# EAGLE board Monoblink_12xPannel (EAGLE 8.6.0)
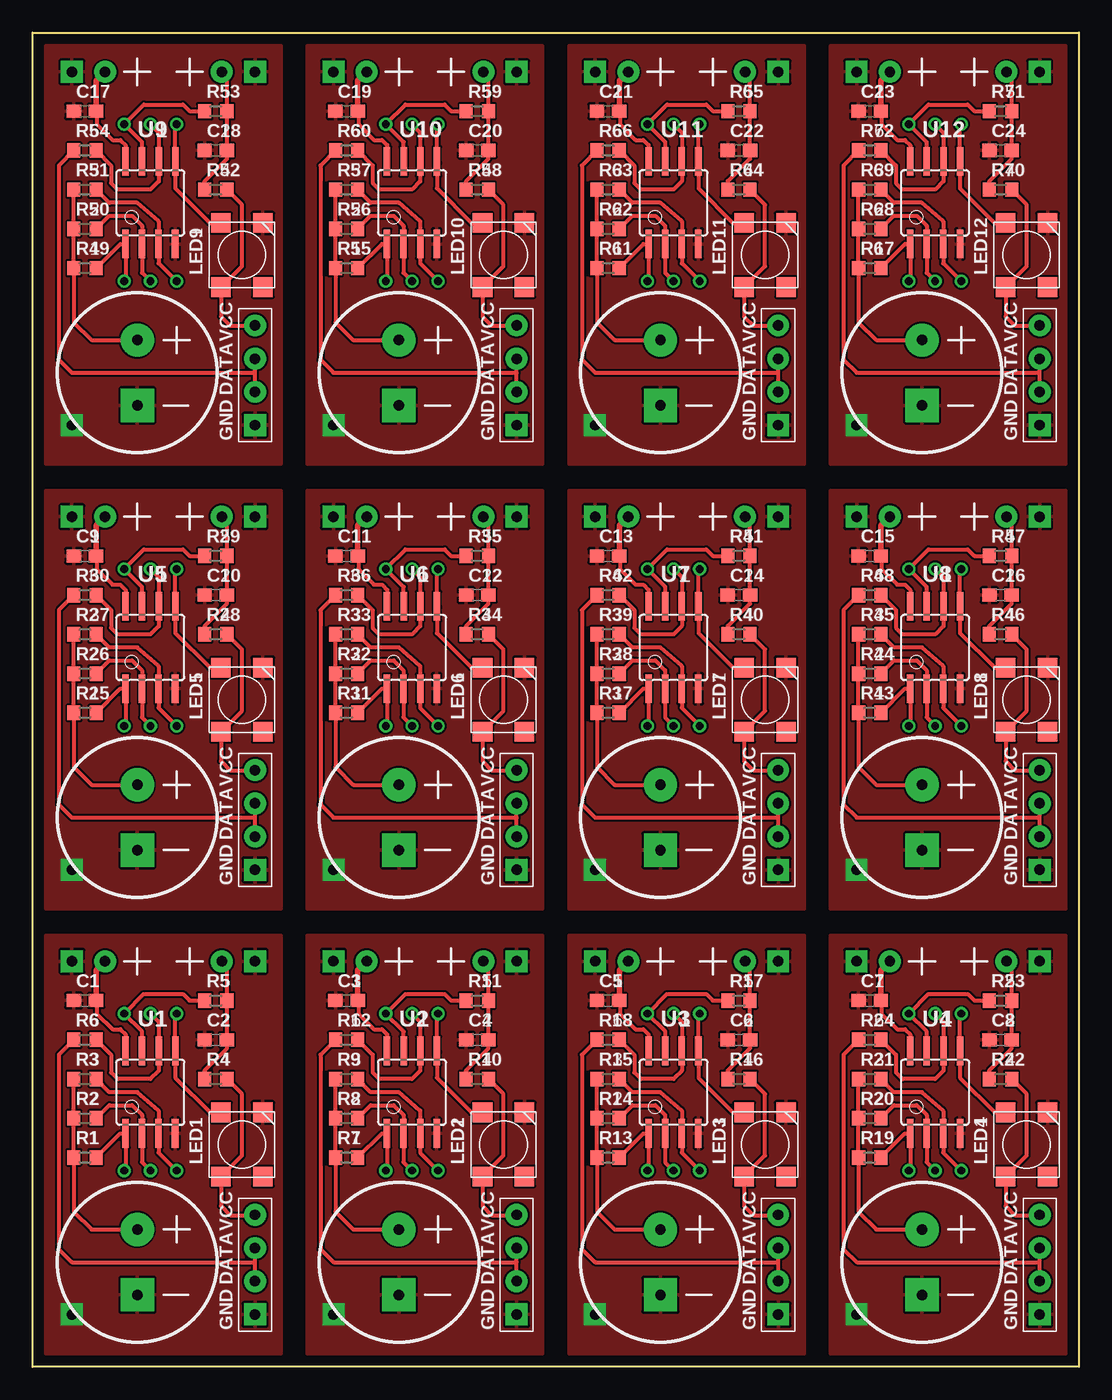
[diagram p0: board, top side]
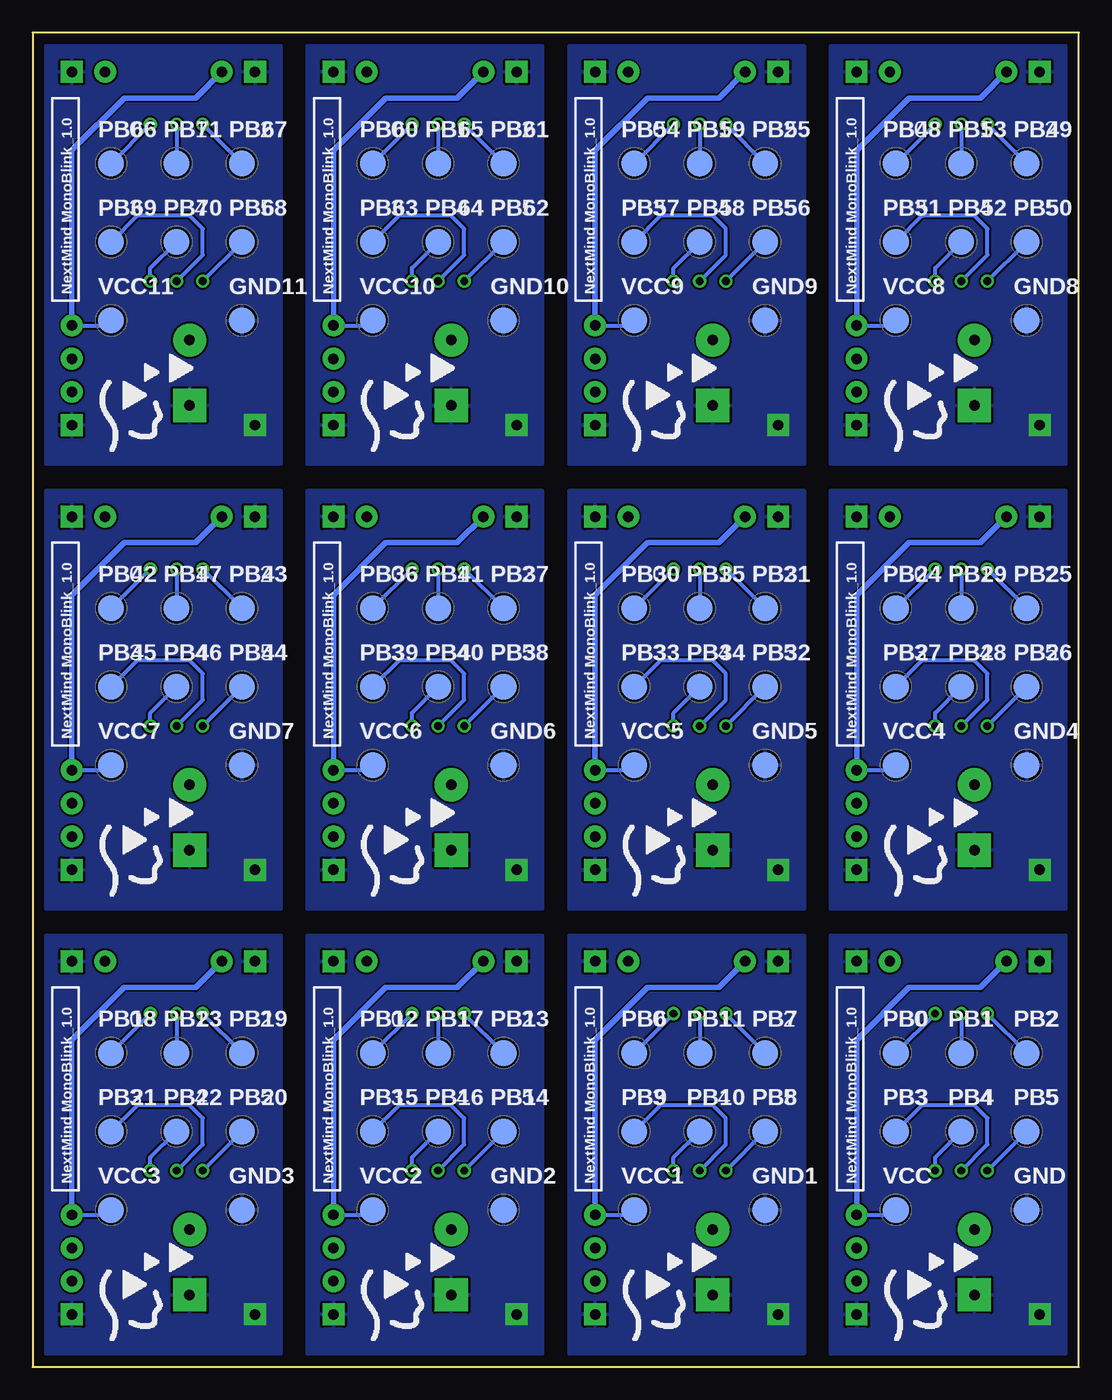
[diagram p1: board, bottom side, seen from below]

Size 80 x 102 mm. Coordinates in mm from the lower left corner, seen from the top.
Outline: 0,0 0,102 80,102 80,0 0,0
Copper layers (1*16): Top 0.018mm / dielectric 1.55mm / Bottom 0.018mm
Design rules "eC_2Layer_PClass6_BaseCopperO18_eCDefault": minimum track width 0.15mm, minimum drill 0.35mm, track to track 0.15mm, track to pad 0.15mm, pad to pad 0.15mm, via to via 0.15mm, smd to smd 0mil, copper to edge 0.25mm, drill to drill 0.35mm, minimum pad ring 0.175mm, minimum via ring 0.125mm, stop-mask expansion 0mil, vias tented up to drill 0.45mm, thermal gap 0.2mm

## Footprints (pad centres in the part's own frame; a part is rotated, then mirrored left to right if it is on the bottom)
C0603 = smd 1.1 x 1: 1 -0.85,0; 2 0.85,0
TP2MM = smd 2 x 2: 1 0,0
SMD5050 = smd 1.5 x 1.5: 1 2.45,-1.6; 2 2.45,1.6; 3 -2.45,1.6; 4 -2.45,-1.6
R0603 = smd 1 x 1.1: 1 -0.85,0; 2 0.85,0
SOIC8 = smd 0.5 x 2.2: 1 -1.905,-3.154; 2 -0.645,-3.154; 3 0.625,-3.154; 4 1.895,-3.154; 5 1.905,3.154; 6 0.635,3.154; 7 -0.635,3.154; 8 -1.905,3.154
RF_CONN = drill 0.8 pad 1.676 square: 1 0,0 | drill 0.8 pad 1.676: 2 0,2.54; 3 0,5.08; 4 0,7.62
PS1240P02BT = drill 0.8 pad 2.54: V+ 0,2.5 | drill 0.8 pad 2.54 square: V- 0,-2.5
TWO_TH = drill 0.8 pad 1.676 square: GND 0,0 | drill 0.8 pad 1.676: VBAT 0,2.54

## Placement (x,y rotation side)
C1  100n  [C0603]  4,28 180 top
C2  100n  [C0603]  14,25 180 top
C3  100n  [C0603]  24,28 180 top
C4  100n  [C0603]  34,25 180 top
C5  100n  [C0603]  44,28 180 top
C6  100n  [C0603]  54,25 180 top
C7  100n  [C0603]  64,28 180 top
C8  100n  [C0603]  74,25 180 top
C9  100n  [C0603]  4,62 180 top
C10  100n  [C0603]  14,59 180 top
C11  100n  [C0603]  24,62 180 top
C12  100n  [C0603]  34,59 180 top
C13  100n  [C0603]  44,62 180 top
C14  100n  [C0603]  54,59 180 top
C15  100n  [C0603]  64,62 180 top
C16  100n  [C0603]  74,59 180 top
C17  100n  [C0603]  4,96 180 top
C18  100n  [C0603]  14,93 180 top
C19  100n  [C0603]  24,96 180 top
C20  100n  [C0603]  34,93 180 top
C21  100n  [C0603]  44,96 180 top
C22  100n  [C0603]  54,93 180 top
C23  100n  [C0603]  64,96 180 top
C24  100n  [C0603]  74,93 180 top
GND  TESTPAD_PROG_BOARD  [TP2MM]  4,12 0 bottom
GND1  TESTPAD_PROG_BOARD  [TP2MM]  24,12 0 bottom
GND2  TESTPAD_PROG_BOARD  [TP2MM]  44,12 0 bottom
GND3  TESTPAD_PROG_BOARD  [TP2MM]  64,12 0 bottom
GND4  TESTPAD_PROG_BOARD  [TP2MM]  4,46 0 bottom
GND5  TESTPAD_PROG_BOARD  [TP2MM]  24,46 0 bottom
GND6  TESTPAD_PROG_BOARD  [TP2MM]  44,46 0 bottom
GND7  TESTPAD_PROG_BOARD  [TP2MM]  64,46 0 bottom
GND8  TESTPAD_PROG_BOARD  [TP2MM]  4,80 0 bottom
GND9  TESTPAD_PROG_BOARD  [TP2MM]  24,80 0 bottom
GND10  TESTPAD_PROG_BOARD  [TP2MM]  44,80 0 bottom
GND11  TESTPAD_PROG_BOARD  [TP2MM]  64,80 0 bottom
LED1  NEOPIXEL  [SMD5050]  16,17 90 top
LED2  NEOPIXEL  [SMD5050]  36,17 90 top
LED3  NEOPIXEL  [SMD5050]  56,17 90 top
LED4  NEOPIXEL  [SMD5050]  76,17 90 top
LED5  NEOPIXEL  [SMD5050]  16,51 90 top
LED6  NEOPIXEL  [SMD5050]  36,51 90 top
LED7  NEOPIXEL  [SMD5050]  56,51 90 top
LED8  NEOPIXEL  [SMD5050]  76,51 90 top
LED9  NEOPIXEL  [SMD5050]  16,85 90 top
LED10  NEOPIXEL  [SMD5050]  36,85 90 top
LED11  NEOPIXEL  [SMD5050]  56,85 90 top
LED12  NEOPIXEL  [SMD5050]  76,85 90 top
PB0  TESTPAD_PROG_BOARD  [TP2MM]  14,24 0 bottom
PB1  TESTPAD_PROG_BOARD  [TP2MM]  9,24 0 bottom
PB2  TESTPAD_PROG_BOARD  [TP2MM]  4,24 0 bottom
PB3  TESTPAD_PROG_BOARD  [TP2MM]  14,18 0 bottom
PB4  TESTPAD_PROG_BOARD  [TP2MM]  9,18 0 bottom
PB5  TESTPAD_PROG_BOARD  [TP2MM]  4,18 0 bottom
PB6  TESTPAD_PROG_BOARD  [TP2MM]  34,24 0 bottom
PB7  TESTPAD_PROG_BOARD  [TP2MM]  24,24 0 bottom
PB8  TESTPAD_PROG_BOARD  [TP2MM]  24,18 0 bottom
PB9  TESTPAD_PROG_BOARD  [TP2MM]  34,18 0 bottom
PB10  TESTPAD_PROG_BOARD  [TP2MM]  29,18 0 bottom
PB11  TESTPAD_PROG_BOARD  [TP2MM]  29,24 0 bottom
PB12  TESTPAD_PROG_BOARD  [TP2MM]  54,24 0 bottom
PB13  TESTPAD_PROG_BOARD  [TP2MM]  44,24 0 bottom
PB14  TESTPAD_PROG_BOARD  [TP2MM]  44,18 0 bottom
PB15  TESTPAD_PROG_BOARD  [TP2MM]  54,18 0 bottom
PB16  TESTPAD_PROG_BOARD  [TP2MM]  49,18 0 bottom
PB17  TESTPAD_PROG_BOARD  [TP2MM]  49,24 0 bottom
PB18  TESTPAD_PROG_BOARD  [TP2MM]  74,24 0 bottom
PB19  TESTPAD_PROG_BOARD  [TP2MM]  64,24 0 bottom
PB20  TESTPAD_PROG_BOARD  [TP2MM]  64,18 0 bottom
PB21  TESTPAD_PROG_BOARD  [TP2MM]  74,18 0 bottom
PB22  TESTPAD_PROG_BOARD  [TP2MM]  69,18 0 bottom
PB23  TESTPAD_PROG_BOARD  [TP2MM]  69,24 0 bottom
PB24  TESTPAD_PROG_BOARD  [TP2MM]  14,58 0 bottom
PB25  TESTPAD_PROG_BOARD  [TP2MM]  4,58 0 bottom
PB26  TESTPAD_PROG_BOARD  [TP2MM]  4,52 0 bottom
PB27  TESTPAD_PROG_BOARD  [TP2MM]  14,52 0 bottom
PB28  TESTPAD_PROG_BOARD  [TP2MM]  9,52 0 bottom
PB29  TESTPAD_PROG_BOARD  [TP2MM]  9,58 0 bottom
PB30  TESTPAD_PROG_BOARD  [TP2MM]  34,58 0 bottom
PB31  TESTPAD_PROG_BOARD  [TP2MM]  24,58 0 bottom
PB32  TESTPAD_PROG_BOARD  [TP2MM]  24,52 0 bottom
PB33  TESTPAD_PROG_BOARD  [TP2MM]  34,52 0 bottom
PB34  TESTPAD_PROG_BOARD  [TP2MM]  29,52 0 bottom
PB35  TESTPAD_PROG_BOARD  [TP2MM]  29,58 0 bottom
PB36  TESTPAD_PROG_BOARD  [TP2MM]  54,58 0 bottom
PB37  TESTPAD_PROG_BOARD  [TP2MM]  44,58 0 bottom
PB38  TESTPAD_PROG_BOARD  [TP2MM]  44,52 0 bottom
PB39  TESTPAD_PROG_BOARD  [TP2MM]  54,52 0 bottom
PB40  TESTPAD_PROG_BOARD  [TP2MM]  49,52 0 bottom
PB41  TESTPAD_PROG_BOARD  [TP2MM]  49,58 0 bottom
PB42  TESTPAD_PROG_BOARD  [TP2MM]  74,58 0 bottom
PB43  TESTPAD_PROG_BOARD  [TP2MM]  64,58 0 bottom
PB44  TESTPAD_PROG_BOARD  [TP2MM]  64,52 0 bottom
PB45  TESTPAD_PROG_BOARD  [TP2MM]  74,52 0 bottom
PB46  TESTPAD_PROG_BOARD  [TP2MM]  69,52 0 bottom
PB47  TESTPAD_PROG_BOARD  [TP2MM]  69,58 0 bottom
PB48  TESTPAD_PROG_BOARD  [TP2MM]  14,92 0 bottom
PB49  TESTPAD_PROG_BOARD  [TP2MM]  4,92 0 bottom
PB50  TESTPAD_PROG_BOARD  [TP2MM]  4,86 0 bottom
PB51  TESTPAD_PROG_BOARD  [TP2MM]  14,86 0 bottom
PB52  TESTPAD_PROG_BOARD  [TP2MM]  9,86 0 bottom
PB53  TESTPAD_PROG_BOARD  [TP2MM]  9,92 0 bottom
PB54  TESTPAD_PROG_BOARD  [TP2MM]  34,92 0 bottom
PB55  TESTPAD_PROG_BOARD  [TP2MM]  24,92 0 bottom
PB56  TESTPAD_PROG_BOARD  [TP2MM]  24,86 0 bottom
PB57  TESTPAD_PROG_BOARD  [TP2MM]  34,86 0 bottom
PB58  TESTPAD_PROG_BOARD  [TP2MM]  29,86 0 bottom
PB59  TESTPAD_PROG_BOARD  [TP2MM]  29,92 0 bottom
PB60  TESTPAD_PROG_BOARD  [TP2MM]  54,92 0 bottom
PB61  TESTPAD_PROG_BOARD  [TP2MM]  44,92 0 bottom
PB62  TESTPAD_PROG_BOARD  [TP2MM]  44,86 0 bottom
PB63  TESTPAD_PROG_BOARD  [TP2MM]  54,86 0 bottom
PB64  TESTPAD_PROG_BOARD  [TP2MM]  49,86 0 bottom
PB65  TESTPAD_PROG_BOARD  [TP2MM]  49,92 0 bottom
PB66  TESTPAD_PROG_BOARD  [TP2MM]  74,92 0 bottom
PB67  TESTPAD_PROG_BOARD  [TP2MM]  64,92 0 bottom
PB68  TESTPAD_PROG_BOARD  [TP2MM]  64,86 0 bottom
PB69  TESTPAD_PROG_BOARD  [TP2MM]  74,86 0 bottom
PB70  TESTPAD_PROG_BOARD  [TP2MM]  69,86 0 bottom
PB71  TESTPAD_PROG_BOARD  [TP2MM]  69,92 0 bottom
R1  50  [R0603]  4,16 180 top
R2  200  [R0603]  4,19 180 top
R3  100  [R0603]  4,22 180 top
R4  10K  [R0603]  14,22 0 top
R5  100K  [R0603]  14,28 180 top
R6  100K  [R0603]  4,25 180 top
R7  50  [R0603]  24,16 180 top
R8  200  [R0603]  24,19 180 top
R9  100  [R0603]  24,22 180 top
R10  10K  [R0603]  34,22 0 top
R11  100K  [R0603]  34,28 180 top
R12  100K  [R0603]  24,25 180 top
R13  50  [R0603]  44,16 180 top
R14  200  [R0603]  44,19 180 top
R15  100  [R0603]  44,22 180 top
R16  10K  [R0603]  54,22 0 top
R17  100K  [R0603]  54,28 180 top
R18  100K  [R0603]  44,25 180 top
R19  50  [R0603]  64,16 180 top
R20  200  [R0603]  64,19 180 top
R21  100  [R0603]  64,22 180 top
R22  10K  [R0603]  74,22 0 top
R23  100K  [R0603]  74,28 180 top
R24  100K  [R0603]  64,25 180 top
R25  50  [R0603]  4,50 180 top
R26  200  [R0603]  4,53 180 top
R27  100  [R0603]  4,56 180 top
R28  10K  [R0603]  14,56 0 top
R29  100K  [R0603]  14,62 180 top
R30  100K  [R0603]  4,59 180 top
R31  50  [R0603]  24,50 180 top
R32  200  [R0603]  24,53 180 top
R33  100  [R0603]  24,56 180 top
R34  10K  [R0603]  34,56 0 top
R35  100K  [R0603]  34,62 180 top
R36  100K  [R0603]  24,59 180 top
R37  50  [R0603]  44,50 180 top
R38  200  [R0603]  44,53 180 top
R39  100  [R0603]  44,56 180 top
R40  10K  [R0603]  54,56 0 top
R41  100K  [R0603]  54,62 180 top
R42  100K  [R0603]  44,59 180 top
R43  50  [R0603]  64,50 180 top
R44  200  [R0603]  64,53 180 top
R45  100  [R0603]  64,56 180 top
R46  10K  [R0603]  74,56 0 top
R47  100K  [R0603]  74,62 180 top
R48  100K  [R0603]  64,59 180 top
R49  50  [R0603]  4,84 180 top
R50  200  [R0603]  4,87 180 top
R51  100  [R0603]  4,90 180 top
R52  10K  [R0603]  14,90 0 top
R53  100K  [R0603]  14,96 180 top
R54  100K  [R0603]  4,93 180 top
R55  50  [R0603]  24,84 180 top
R56  200  [R0603]  24,87 180 top
R57  100  [R0603]  24,90 180 top
R58  10K  [R0603]  34,90 0 top
R59  100K  [R0603]  34,96 180 top
R60  100K  [R0603]  24,93 180 top
R61  50  [R0603]  44,84 180 top
R62  200  [R0603]  44,87 180 top
R63  100  [R0603]  44,90 180 top
R64  10K  [R0603]  54,90 0 top
R65  100K  [R0603]  54,96 180 top
R66  100K  [R0603]  44,93 180 top
R67  50  [R0603]  64,84 180 top
R68  200  [R0603]  64,87 180 top
R69  100  [R0603]  64,90 180 top
R70  10K  [R0603]  74,90 0 top
R71  100K  [R0603]  74,96 180 top
R72  100K  [R0603]  64,93 180 top
U1  ATTINY85  [SOIC8]  9,21 0 top
U2  ATTINY85  [SOIC8]  29,21 0 top
U3  ATTINY85  [SOIC8]  49,21 0 top
U4  ATTINY85  [SOIC8]  69,21 0 top
U5  ATTINY85  [SOIC8]  9,55 0 top
U6  ATTINY85  [SOIC8]  29,55 0 top
U7  ATTINY85  [SOIC8]  49,55 0 top
U8  ATTINY85  [SOIC8]  69,55 0 top
U9  ATTINY85  [SOIC8]  9,89 0 top
U10  ATTINY85  [SOIC8]  29,89 0 top
U11  ATTINY85  [SOIC8]  49,89 0 top
U12  ATTINY85  [SOIC8]  69,89 0 top
U$1  RF_CONN  [RF_CONN]  17,4 0 top
U$2  PIEZO  [PS1240P02BT]  8,8 0 top
U$3  BATT_TH  [TWO_TH]  3,31 270 top
U$4  SNSR_CONN  [TWO_TH]  17,31 90 top
U$5  RF_CONN  [RF_CONN]  37,4 0 top
U$6  PIEZO  [PS1240P02BT]  28,8 0 top
U$7  BATT_TH  [TWO_TH]  23,31 270 top
U$8  SNSR_CONN  [TWO_TH]  37,31 90 top
U$9  RF_CONN  [RF_CONN]  57,4 0 top
U$10  PIEZO  [PS1240P02BT]  48,8 0 top
U$11  BATT_TH  [TWO_TH]  43,31 270 top
U$12  SNSR_CONN  [TWO_TH]  57,31 90 top
U$13  RF_CONN  [RF_CONN]  77,4 0 top
U$14  PIEZO  [PS1240P02BT]  68,8 0 top
U$15  BATT_TH  [TWO_TH]  63,31 270 top
U$16  SNSR_CONN  [TWO_TH]  77,31 90 top
U$17  RF_CONN  [RF_CONN]  17,38 0 top
U$18  PIEZO  [PS1240P02BT]  8,42 0 top
U$19  BATT_TH  [TWO_TH]  3,65 270 top
U$20  SNSR_CONN  [TWO_TH]  17,65 90 top
U$21  RF_CONN  [RF_CONN]  37,38 0 top
U$22  PIEZO  [PS1240P02BT]  28,42 0 top
U$23  BATT_TH  [TWO_TH]  23,65 270 top
U$24  SNSR_CONN  [TWO_TH]  37,65 90 top
U$25  RF_CONN  [RF_CONN]  57,38 0 top
U$26  PIEZO  [PS1240P02BT]  48,42 0 top
U$27  BATT_TH  [TWO_TH]  43,65 270 top
U$28  SNSR_CONN  [TWO_TH]  57,65 90 top
U$29  RF_CONN  [RF_CONN]  77,38 0 top
U$30  PIEZO  [PS1240P02BT]  68,42 0 top
U$31  BATT_TH  [TWO_TH]  63,65 270 top
U$32  SNSR_CONN  [TWO_TH]  77,65 90 top
U$33  RF_CONN  [RF_CONN]  17,72 0 top
U$34  PIEZO  [PS1240P02BT]  8,76 0 top
U$35  BATT_TH  [TWO_TH]  3,99 270 top
U$36  SNSR_CONN  [TWO_TH]  17,99 90 top
U$37  RF_CONN  [RF_CONN]  37,72 0 top
U$38  PIEZO  [PS1240P02BT]  28,76 0 top
U$39  BATT_TH  [TWO_TH]  23,99 270 top
U$40  SNSR_CONN  [TWO_TH]  37,99 90 top
U$41  RF_CONN  [RF_CONN]  57,72 0 top
U$42  PIEZO  [PS1240P02BT]  48,76 0 top
U$43  BATT_TH  [TWO_TH]  43,99 270 top
U$44  SNSR_CONN  [TWO_TH]  57,99 90 top
U$45  RF_CONN  [RF_CONN]  77,72 0 top
U$46  PIEZO  [PS1240P02BT]  68,76 0 top
U$47  BATT_TH  [TWO_TH]  63,99 270 top
U$48  SNSR_CONN  [TWO_TH]  77,99 90 top
VCC  TESTPAD_PROG_BOARD  [TP2MM]  14,12 0 bottom
VCC1  TESTPAD_PROG_BOARD  [TP2MM]  34,12 0 bottom
VCC2  TESTPAD_PROG_BOARD  [TP2MM]  54,12 0 bottom
VCC3  TESTPAD_PROG_BOARD  [TP2MM]  74,12 0 bottom
VCC4  TESTPAD_PROG_BOARD  [TP2MM]  14,46 0 bottom
VCC5  TESTPAD_PROG_BOARD  [TP2MM]  34,46 0 bottom
VCC6  TESTPAD_PROG_BOARD  [TP2MM]  54,46 0 bottom
VCC7  TESTPAD_PROG_BOARD  [TP2MM]  74,46 0 bottom
VCC8  TESTPAD_PROG_BOARD  [TP2MM]  14,80 0 bottom
VCC9  TESTPAD_PROG_BOARD  [TP2MM]  34,80 0 bottom
VCC10  TESTPAD_PROG_BOARD  [TP2MM]  54,80 0 bottom
VCC11  TESTPAD_PROG_BOARD  [TP2MM]  74,80 0 bottom

## Library data of the parts
C1-C24 = Monoblink; SPICEPREFIX: C
GND GND1-GND11 LED1-LED12 PB0 PB1-PB71 U1-U12 U$1-U$48 VCC VCC1-VCC11 = Monoblink
R1-R72 = Monoblink; SPICEPREFIX: R

## Nets
GND: C1.2 C2.2 GND.1 LED1.1 U1.4 U$1.1 U$2.V- U$3.GND U$4.GND
GND1: C3.2 C4.2 GND1.1 LED2.1 U2.4 U$5.1 U$6.V- U$7.GND U$8.GND
GND2: C5.2 C6.2 GND2.1 LED3.1 U3.4 U$9.1 U$10.V- U$11.GND U$12.GND
GND3: C7.2 C8.2 GND3.1 LED4.1 U4.4 U$13.1 U$14.V- U$15.GND U$16.GND
GND4: C9.2 C10.2 GND4.1 LED5.1 U5.4 U$17.1 U$18.V- U$19.GND U$20.GND
GND5: C11.2 C12.2 GND5.1 LED6.1 U6.4 U$21.1 U$22.V- U$23.GND U$24.GND
GND6: C13.2 C14.2 GND6.1 LED7.1 U7.4 U$25.1 U$26.V- U$27.GND U$28.GND
GND7: C15.2 C16.2 GND7.1 LED8.1 U8.4 U$29.1 U$30.V- U$31.GND U$32.GND
GND8: C17.2 C18.2 GND8.1 LED9.1 U9.4 U$33.1 U$34.V- U$35.GND U$36.GND
GND9: C19.2 C20.2 GND9.1 LED10.1 U10.4 U$37.1 U$38.V- U$39.GND U$40.GND
GND10: C21.2 C22.2 GND10.1 LED11.1 U11.4 U$41.1 U$42.V- U$43.GND U$44.GND
GND11: C23.2 C24.2 GND11.1 LED12.1 U12.4 U$45.1 U$46.V- U$47.GND U$48.GND
LED_DATA_OUT: LED1.4
LED_DATA_OUT1: LED2.4
LED_DATA_OUT2: LED3.4
LED_DATA_OUT3: LED4.4
LED_DATA_OUT4: LED5.4
LED_DATA_OUT5: LED6.4
LED_DATA_OUT6: LED7.4
LED_DATA_OUT7: LED8.4
LED_DATA_OUT8: LED9.4
LED_DATA_OUT9: LED10.4
LED_DATA_OUT10: LED11.4
LED_DATA_OUT11: LED12.4
PB0: LED1.2 PB0.1 U1.5
PB1: PB1.1 R6.1 U1.6
PB2: PB2.1 R5.2 U1.7
PB3: PB3.1 R2.1 U1.2
PB4: PB4.1 R3.1 U1.3
PB5: PB5.1 R1.1 U1.1
PB6: PB8.1 R7.1 U2.1
PB7: PB10.1 R9.1 U2.3
PB8: PB9.1 R8.1 U2.2
PB9: PB7.1 R11.2 U2.7
PB10: PB11.1 R12.1 U2.6
PB11: LED2.2 PB6.1 U2.5
PB12: PB14.1 R13.1 U3.1
PB13: PB16.1 R15.1 U3.3
PB14: PB15.1 R14.1 U3.2
PB15: PB13.1 R17.2 U3.7
PB16: PB17.1 R18.1 U3.6
PB17: LED3.2 PB12.1 U3.5
PB18: PB20.1 R19.1 U4.1
PB19: PB22.1 R21.1 U4.3
PB20: PB21.1 R20.1 U4.2
PB21: PB19.1 R23.2 U4.7
PB22: PB23.1 R24.1 U4.6
PB23: LED4.2 PB18.1 U4.5
PB24: PB26.1 R25.1 U5.1
PB25: PB28.1 R27.1 U5.3
PB26: PB27.1 R26.1 U5.2
PB27: PB25.1 R29.2 U5.7
PB28: PB29.1 R30.1 U5.6
PB29: LED5.2 PB24.1 U5.5
PB30: PB32.1 R31.1 U6.1
PB31: PB34.1 R33.1 U6.3
PB32: PB33.1 R32.1 U6.2
PB33: PB31.1 R35.2 U6.7
PB34: PB35.1 R36.1 U6.6
PB35: LED6.2 PB30.1 U6.5
PB36: PB38.1 R37.1 U7.1
PB37: PB40.1 R39.1 U7.3
PB38: PB39.1 R38.1 U7.2
PB39: PB37.1 R41.2 U7.7
PB40: PB41.1 R42.1 U7.6
PB41: LED7.2 PB36.1 U7.5
PB42: PB44.1 R43.1 U8.1
PB43: PB46.1 R45.1 U8.3
PB44: PB45.1 R44.1 U8.2
PB45: PB43.1 R47.2 U8.7
PB46: PB47.1 R48.1 U8.6
PB47: LED8.2 PB42.1 U8.5
PB48: PB50.1 R49.1 U9.1
PB49: PB52.1 R51.1 U9.3
PB50: PB51.1 R50.1 U9.2
PB51: PB49.1 R53.2 U9.7
PB52: PB53.1 R54.1 U9.6
PB53: LED9.2 PB48.1 U9.5
PB54: PB56.1 R55.1 U10.1
PB55: PB58.1 R57.1 U10.3
PB56: PB57.1 R56.1 U10.2
PB57: PB55.1 R59.2 U10.7
PB58: PB59.1 R60.1 U10.6
PB59: LED10.2 PB54.1 U10.5
PB60: PB62.1 R61.1 U11.1
PB61: PB64.1 R63.1 U11.3
PB62: PB63.1 R62.1 U11.2
PB63: PB61.1 R65.2 U11.7
PB64: PB65.1 R66.1 U11.6
PB65: LED11.2 PB60.1 U11.5
PB66: PB68.1 R67.1 U12.1
PB67: PB70.1 R69.1 U12.3
PB68: PB69.1 R68.1 U12.2
PB69: PB67.1 R71.2 U12.7
PB70: PB71.1 R72.1 U12.6
PB71: LED12.2 PB66.1 U12.5
PIEZO_IN: R1.2 R2.2 R3.2 U$2.V+
PIEZO_IN1: R7.2 R8.2 R9.2 U$6.V+
PIEZO_IN2: R13.2 R14.2 R15.2 U$10.V+
PIEZO_IN3: R19.2 R20.2 R21.2 U$14.V+
PIEZO_IN4: R25.2 R26.2 R27.2 U$18.V+
PIEZO_IN5: R31.2 R32.2 R33.2 U$22.V+
PIEZO_IN6: R37.2 R38.2 R39.2 U$26.V+
PIEZO_IN7: R43.2 R44.2 R45.2 U$30.V+
PIEZO_IN8: R49.2 R50.2 R51.2 U$34.V+
PIEZO_IN9: R55.2 R56.2 R57.2 U$38.V+
PIEZO_IN10: R61.2 R62.2 R63.2 U$42.V+
PIEZO_IN11: R67.2 R68.2 R69.2 U$46.V+
RF_DATA_OUT: R6.2 U$1.2 U$1.3
RF_DATA_OUT1: R12.2 U$5.2 U$5.3
RF_DATA_OUT2: R18.2 U$9.2 U$9.3
RF_DATA_OUT3: R24.2 U$13.2 U$13.3
RF_DATA_OUT4: R30.2 U$17.2 U$17.3
RF_DATA_OUT5: R36.2 U$21.2 U$21.3
RF_DATA_OUT6: R42.2 U$25.2 U$25.3
RF_DATA_OUT7: R48.2 U$29.2 U$29.3
RF_DATA_OUT8: R54.2 U$33.2 U$33.3
RF_DATA_OUT9: R60.2 U$37.2 U$37.3
RF_DATA_OUT10: R66.2 U$41.2 U$41.3
RF_DATA_OUT11: R72.2 U$45.2 U$45.3
SENSOR_OUT: C2.1 R4.1 R5.1 U$4.VBAT
SENSOR_OUT1: C4.1 R10.1 R11.1 U$8.VBAT
SENSOR_OUT2: C6.1 R16.1 R17.1 U$12.VBAT
SENSOR_OUT3: C8.1 R22.1 R23.1 U$16.VBAT
SENSOR_OUT4: C10.1 R28.1 R29.1 U$20.VBAT
SENSOR_OUT5: C12.1 R34.1 R35.1 U$24.VBAT
SENSOR_OUT6: C14.1 R40.1 R41.1 U$28.VBAT
SENSOR_OUT7: C16.1 R46.1 R47.1 U$32.VBAT
SENSOR_OUT8: C18.1 R52.1 R53.1 U$36.VBAT
SENSOR_OUT9: C20.1 R58.1 R59.1 U$40.VBAT
SENSOR_OUT10: C22.1 R64.1 R65.1 U$44.VBAT
SENSOR_OUT11: C24.1 R70.1 R71.1 U$48.VBAT
VCC: C1.1 LED1.3 R4.2 U1.8 U$1.4 U$3.VBAT VCC.1
VCC1: C3.1 LED2.3 R10.2 U2.8 U$5.4 U$7.VBAT VCC1.1
VCC2: C5.1 LED3.3 R16.2 U3.8 U$9.4 U$11.VBAT VCC2.1
VCC3: C7.1 LED4.3 R22.2 U4.8 U$13.4 U$15.VBAT VCC3.1
VCC4: C9.1 LED5.3 R28.2 U5.8 U$17.4 U$19.VBAT VCC4.1
VCC5: C11.1 LED6.3 R34.2 U6.8 U$21.4 U$23.VBAT VCC5.1
VCC6: C13.1 LED7.3 R40.2 U7.8 U$25.4 U$27.VBAT VCC6.1
VCC7: C15.1 LED8.3 R46.2 U8.8 U$29.4 U$31.VBAT VCC7.1
VCC8: C17.1 LED9.3 R52.2 U9.8 U$33.4 U$35.VBAT VCC8.1
VCC9: C19.1 LED10.3 R58.2 U10.8 U$37.4 U$39.VBAT VCC9.1
VCC10: C21.1 LED11.3 R64.2 U11.8 U$41.4 U$43.VBAT VCC10.1
VCC11: C23.1 LED12.3 R70.2 U12.8 U$45.4 U$47.VBAT VCC11.1

## Tracks (layer width: path | path; a pad name or v marks a point on that pad's centre or on a via)
GND  (via drill 0.8 pad 1.68)
  other vias: 3,4
  pour Top (rank 3): 1,33 19,33 19,1 1,1
  pour Bottom (rank 2): 1,33 19,33 19,1 1,1
GND1  (via drill 0.8 pad 1.68)
  other vias: 23,4
  pour Top (rank 3): 21,33 39,33 39,1 21,1
  pour Bottom (rank 2): 21,33 39,33 39,1 21,1
GND2  (via drill 0.8 pad 1.68)
  other vias: 43,4
  pour Top (rank 3): 41,33 59,33 59,1 41,1
  pour Bottom (rank 2): 41,33 59,33 59,1 41,1
GND3  (via drill 0.8 pad 1.68)
  other vias: 63,4
  pour Top (rank 3): 61,33 79,33 79,1 61,1
  pour Bottom (rank 2): 61,33 79,33 79,1 61,1
GND4  (via drill 0.8 pad 1.68)
  other vias: 3,38
  pour Top (rank 3): 1,67 19,67 19,35 1,35
  pour Bottom (rank 2): 1,67 19,67 19,35 1,35
GND5  (via drill 0.8 pad 1.68)
  other vias: 23,38
  pour Top (rank 3): 21,67 39,67 39,35 21,35
  pour Bottom (rank 2): 21,67 39,67 39,35 21,35
GND6  (via drill 0.8 pad 1.68)
  other vias: 43,38
  pour Top (rank 3): 41,67 59,67 59,35 41,35
  pour Bottom (rank 2): 41,67 59,67 59,35 41,35
GND7  (via drill 0.8 pad 1.68)
  other vias: 63,38
  pour Top (rank 3): 61,67 79,67 79,35 61,35
  pour Bottom (rank 2): 61,67 79,67 79,35 61,35
GND8  (via drill 0.8 pad 1.68)
  other vias: 3,72
  pour Top (rank 3): 1,101 19,101 19,69 1,69
  pour Bottom (rank 2): 1,101 19,101 19,69 1,69
GND9  (via drill 0.8 pad 1.68)
  other vias: 23,72
  pour Top (rank 3): 21,101 39,101 39,69 21,69
  pour Bottom (rank 2): 21,101 39,101 39,69 21,69
GND10  (via drill 0.8 pad 1.68)
  other vias: 43,72
  pour Top (rank 3): 41,101 59,101 59,69 41,69
  pour Bottom (rank 2): 41,101 59,101 59,69 41,69
GND11  (via drill 0.8 pad 1.68)
  other vias: 63,72
  pour Top (rank 3): 61,101 79,101 79,69 61,69
  pour Bottom (rank 2): 61,101 79,101 79,69 61,69
PB0  (via drill 0.6 pad 1)
  Top 0.305: U1.5 10.9,26.91 v11,27 | U1.5 11,24.06 | LED1.2 13.55,19.45 10.9,22.09 U1.5
  Bottom 0.305: v11,27 PB0.1
PB1  (via drill 0.6 pad 1)
  Top 0.305: v9,27 9.63,26.36 U1.6 9.63,22.64 9,22 6.5,22 6,22.5 6,23.85 R6.1
  Bottom 0.305: v9,27 PB1.1
PB2  (via drill 0.6 pad 1)
  Top 0.305: U1.7 8.37,25.64 v7,27 8.5,28.5 11.5,28.5 12,28 R5.2
  Bottom 0.305: v7,27 PB2.1
PB3  (via drill 0.6 pad 1)
  Top 0.305: R2.1 5.85,20 7.6,20 8.36,19.25 U1.2 8.36,15.64 v9,15
  Bottom 0.305: v9,15 7,17 7,19 8,20 12,20 PB3.1
PB4  (via drill 0.6 pad 1)
  Top 0.305: v11,15 9.62,16.38 U1.3 9.62,19.57 8,21 5.85,21 R3.1
  Bottom 0.305: v11,15 11,16 PB4.1
PB5  (via drill 0.6 pad 1)
  Top 0.305: R1.1 6.7,17.85 U1.1 7.09,15.1 v7,15
  Bottom 0.305: v7,15 PB5.1
PB6  (via drill 0.6 pad 1)
  Top 0.305: R7.1 26.7,17.85 U2.1 27.09,15.1 v27,15
  Bottom 0.305: v27,15 PB8.1
PB7  (via drill 0.6 pad 1)
  Top 0.305: v31,15 29.62,16.38 U2.3 29.62,19.57 28,21 25.85,21 R9.1
  Bottom 0.305: v31,15 31,16 PB10.1
PB8  (via drill 0.6 pad 1)
  Top 0.305: R8.1 25.85,20 27.6,20 28.36,19.25 U2.2 28.36,15.64 v29,15
  Bottom 0.305: v29,15 27,17 27,19 28,20 32,20 PB9.1
PB9  (via drill 0.6 pad 1)
  Top 0.305: U2.7 28.36,25.64 v27,27 28.5,28.5 31.5,28.5 32,28 R11.2
  Bottom 0.305: v27,27 PB7.1
PB10  (via drill 0.6 pad 1)
  Top 0.305: v29,27 29.64,26.36 U2.6 29.64,22.64 29,22 26.5,22 26,22.5 26,23.85 R12.1
  Bottom 0.305: v29,27 PB11.1
PB11  (via drill 0.6 pad 1)
  Top 0.305: U2.5 30.91,26.91 v31,27 | U2.5 31,24.06 | LED2.2 33.55,19.45 30.91,22.09 U2.5
  Bottom 0.305: v31,27 PB6.1
PB12  (via drill 0.6 pad 1)
  Top 0.305: R13.1 46.7,17.85 U3.1 47.09,15.1 v47,15
  Bottom 0.305: v47,15 PB14.1
PB13  (via drill 0.6 pad 1)
  Top 0.305: v51,15 49.62,16.38 U3.3 49.62,19.57 48,21 45.85,21 R15.1
  Bottom 0.305: v51,15 51,16 PB16.1
PB14  (via drill 0.6 pad 1)
  Top 0.305: R14.1 45.85,20 47.6,20 48.35,19.25 U3.2 48.35,15.64 v49,15
  Bottom 0.305: v49,15 47,17 47,19 48,20 52,20 PB15.1
PB15  (via drill 0.6 pad 1)
  Top 0.305: U3.7 48.37,25.64 v47,27 48.5,28.5 51.5,28.5 52,28 R17.2
  Bottom 0.305: v47,27 PB13.1
PB16  (via drill 0.6 pad 1)
  Top 0.305: v49,27 49.63,26.36 U3.6 49.63,22.64 49,22 46.5,22 46,22.5 46,23.85 R18.1
  Bottom 0.305: v49,27 PB17.1
PB17  (via drill 0.6 pad 1)
  Top 0.305: U3.5 50.91,26.91 v51,27 | U3.5 51,24.06 | LED3.2 53.55,19.45 50.91,22.09 U3.5
  Bottom 0.305: v51,27 PB12.1
PB18  (via drill 0.6 pad 1)
  Top 0.305: R19.1 66.7,17.85 U4.1 67.09,15.1 v67,15
  Bottom 0.305: v67,15 PB20.1
PB19  (via drill 0.6 pad 1)
  Top 0.305: v71,15 69.62,16.38 U4.3 69.62,19.57 68,21 65.85,21 R21.1
  Bottom 0.305: v71,15 71,16 PB22.1
PB20  (via drill 0.6 pad 1)
  Top 0.305: R20.1 65.85,20 67.6,20 68.36,19.25 U4.2 68.36,15.64 v69,15
  Bottom 0.305: v69,15 67,17 67,19 68,20 72,20 PB21.1
PB21  (via drill 0.6 pad 1)
  Top 0.305: U4.7 68.36,25.64 v67,27 68.5,28.5 71.5,28.5 72,28 R23.2
  Bottom 0.305: v67,27 PB19.1
PB22  (via drill 0.6 pad 1)
  Top 0.305: v69,27 69.64,26.36 U4.6 69.64,22.64 69,22 66.5,22 66,22.5 66,23.85 R24.1
  Bottom 0.305: v69,27 PB23.1
PB23  (via drill 0.6 pad 1)
  Top 0.305: U4.5 70.91,26.91 v71,27 | U4.5 71,24.06 | LED4.2 73.55,19.45 70.91,22.09 U4.5
  Bottom 0.305: v71,27 PB18.1
PB24  (via drill 0.6 pad 1)
  Top 0.305: R25.1 6.7,51.85 U5.1 7.09,49.09 v7,49
  Bottom 0.305: v7,49 PB26.1
PB25  (via drill 0.6 pad 1)
  Top 0.305: v11,49 9.62,50.38 U5.3 9.62,53.58 8,55 5.85,55 R27.1
  Bottom 0.305: v11,49 11,50 PB28.1
PB26  (via drill 0.6 pad 1)
  Top 0.305: R26.1 5.85,54 7.6,54 8.36,53.24 U5.2 8.36,49.65 v9,49
  Bottom 0.305: v9,49 7,51 7,53 8,54 12,54 PB27.1
PB27  (via drill 0.6 pad 1)
  Top 0.305: U5.7 8.37,59.63 v7,61 8.5,62.5 11.5,62.5 12,62 R29.2
  Bottom 0.305: v7,61 PB25.1
PB28  (via drill 0.6 pad 1)
  Top 0.305: v9,61 9.63,60.37 U5.6 9.63,56.63 9,56 6.5,56 6,56.5 6,57.85 R30.1
  Bottom 0.305: v9,61 PB29.1
PB29  (via drill 0.6 pad 1)
  Top 0.305: U5.5 10.9,60.91 v11,61 | U5.5 11,58.06 | LED5.2 13.55,53.45 10.9,56.09 U5.5
  Bottom 0.305: v11,61 PB24.1
PB30  (via drill 0.6 pad 1)
  Top 0.305: R31.1 26.7,51.85 U6.1 27.09,49.09 v27,49
  Bottom 0.305: v27,49 PB32.1
PB31  (via drill 0.6 pad 1)
  Top 0.305: v31,49 29.62,50.38 U6.3 29.62,53.58 28,55 25.85,55 R33.1
  Bottom 0.305: v31,49 31,50 PB34.1
PB32  (via drill 0.6 pad 1)
  Top 0.305: R32.1 25.85,54 27.6,54 28.36,53.24 U6.2 28.36,49.65 v29,49
  Bottom 0.305: v29,49 27,51 27,53 28,54 32,54 PB33.1
PB33  (via drill 0.6 pad 1)
  Top 0.305: U6.7 28.36,59.63 v27,61 28.5,62.5 31.5,62.5 32,62 R35.2
  Bottom 0.305: v27,61 PB31.1
PB34  (via drill 0.6 pad 1)
  Top 0.305: v29,61 29.64,60.37 U6.6 29.64,56.63 29,56 26.5,56 26,56.5 26,57.85 R36.1
  Bottom 0.305: v29,61 PB35.1
PB35  (via drill 0.6 pad 1)
  Top 0.305: U6.5 30.91,60.91 v31,61 | U6.5 31,58.06 | LED6.2 33.55,53.45 30.91,56.09 U6.5
  Bottom 0.305: v31,61 PB30.1
PB36  (via drill 0.6 pad 1)
  Top 0.305: R37.1 46.7,51.85 U7.1 47.09,49.09 v47,49
  Bottom 0.305: v47,49 PB38.1
PB37  (via drill 0.6 pad 1)
  Top 0.305: v51,49 49.62,50.38 U7.3 49.62,53.58 48,55 45.85,55 R39.1
  Bottom 0.305: v51,49 51,50 PB40.1
PB38  (via drill 0.6 pad 1)
  Top 0.305: R38.1 45.85,54 47.6,54 48.35,53.24 U7.2 48.35,49.65 v49,49
  Bottom 0.305: v49,49 47,51 47,53 48,54 52,54 PB39.1
PB39  (via drill 0.6 pad 1)
  Top 0.305: U7.7 48.37,59.63 v47,61 48.5,62.5 51.5,62.5 52,62 R41.2
  Bottom 0.305: v47,61 PB37.1
PB40  (via drill 0.6 pad 1)
  Top 0.305: v49,61 49.63,60.37 U7.6 49.63,56.63 49,56 46.5,56 46,56.5 46,57.85 R42.1
  Bottom 0.305: v49,61 PB41.1
PB41  (via drill 0.6 pad 1)
  Top 0.305: U7.5 50.91,60.91 v51,61 | U7.5 51,58.06 | LED7.2 53.55,53.45 50.91,56.09 U7.5
  Bottom 0.305: v51,61 PB36.1
PB42  (via drill 0.6 pad 1)
  Top 0.305: R43.1 66.7,51.85 U8.1 67.09,49.09 v67,49
  Bottom 0.305: v67,49 PB44.1
PB43  (via drill 0.6 pad 1)
  Top 0.305: v71,49 69.62,50.38 U8.3 69.62,53.58 68,55 65.85,55 R45.1
  Bottom 0.305: v71,49 71,50 PB46.1
PB44  (via drill 0.6 pad 1)
  Top 0.305: R44.1 65.85,54 67.6,54 68.36,53.24 U8.2 68.36,49.65 v69,49
  Bottom 0.305: v69,49 67,51 67,53 68,54 72,54 PB45.1
PB45  (via drill 0.6 pad 1)
  Top 0.305: U8.7 68.36,59.63 v67,61 68.5,62.5 71.5,62.5 72,62 R47.2
  Bottom 0.305: v67,61 PB43.1
PB46  (via drill 0.6 pad 1)
  Top 0.305: v69,61 69.64,60.37 U8.6 69.64,56.63 69,56 66.5,56 66,56.5 66,57.85 R48.1
  Bottom 0.305: v69,61 PB47.1
PB47  (via drill 0.6 pad 1)
  Top 0.305: U8.5 70.91,60.91 v71,61 | U8.5 71,58.06 | LED8.2 73.55,53.45 70.91,56.09 U8.5
  Bottom 0.305: v71,61 PB42.1
PB48  (via drill 0.6 pad 1)
  Top 0.305: R49.1 6.7,85.85 U9.1 7.09,83.09 v7,83
  Bottom 0.305: v7,83 PB50.1
PB49  (via drill 0.6 pad 1)
  Top 0.305: v11,83 9.62,84.38 U9.3 9.62,87.58 8,89 5.85,89 R51.1
  Bottom 0.305: v11,83 11,84 PB52.1
PB50  (via drill 0.6 pad 1)
  Top 0.305: R50.1 5.85,88 7.6,88 8.36,87.25 U9.2 8.36,83.64 v9,83
  Bottom 0.305: v9,83 7,85 7,87 8,88 12,88 PB51.1
PB51  (via drill 0.6 pad 1)
  Top 0.305: U9.7 8.37,93.64 v7,95 8.5,96.5 11.5,96.5 12,96 R53.2
  Bottom 0.305: v7,95 PB49.1
PB52  (via drill 0.6 pad 1)
  Top 0.305: v9,95 9.63,94.36 U9.6 9.63,90.64 9,90 6.5,90 6,90.5 6,91.85 R54.1
  Bottom 0.305: v9,95 PB53.1
PB53  (via drill 0.6 pad 1)
  Top 0.305: U9.5 10.9,94.91 v11,95 | U9.5 11,92.06 | LED9.2 13.55,87.45 10.9,90.09 U9.5
  Bottom 0.305: v11,95 PB48.1
PB54  (via drill 0.6 pad 1)
  Top 0.305: R55.1 26.7,85.85 U10.1 27.09,83.09 v27,83
  Bottom 0.305: v27,83 PB56.1
PB55  (via drill 0.6 pad 1)
  Top 0.305: v31,83 29.62,84.38 U10.3 29.62,87.58 28,89 25.85,89 R57.1
  Bottom 0.305: v31,83 31,84 PB58.1
PB56  (via drill 0.6 pad 1)
  Top 0.305: R56.1 25.85,88 27.6,88 28.36,87.25 U10.2 28.36,83.64 v29,83
  Bottom 0.305: v29,83 27,85 27,87 28,88 32,88 PB57.1
PB57  (via drill 0.6 pad 1)
  Top 0.305: U10.7 28.36,93.64 v27,95 28.5,96.5 31.5,96.5 32,96 R59.2
  Bottom 0.305: v27,95 PB55.1
PB58  (via drill 0.6 pad 1)
  Top 0.305: v29,95 29.64,94.36 U10.6 29.64,90.64 29,90 26.5,90 26,90.5 26,91.85 R60.1
  Bottom 0.305: v29,95 PB59.1
PB59  (via drill 0.6 pad 1)
  Top 0.305: U10.5 30.91,94.91 v31,95 | U10.5 31,92.06 | LED10.2 33.55,87.45 30.91,90.09 U10.5
  Bottom 0.305: v31,95 PB54.1
PB60  (via drill 0.6 pad 1)
  Top 0.305: R61.1 46.7,85.85 U11.1 47.09,83.09 v47,83
  Bottom 0.305: v47,83 PB62.1
PB61  (via drill 0.6 pad 1)
  Top 0.305: v51,83 49.62,84.38 U11.3 49.62,87.58 48,89 45.85,89 R63.1
  Bottom 0.305: v51,83 51,84 PB64.1
PB62  (via drill 0.6 pad 1)
  Top 0.305: R62.1 45.85,88 47.6,88 48.35,87.25 U11.2 48.35,83.64 v49,83
  Bottom 0.305: v49,83 47,85 47,87 48,88 52,88 PB63.1
PB63  (via drill 0.6 pad 1)
  Top 0.305: U11.7 48.37,93.64 v47,95 48.5,96.5 51.5,96.5 52,96 R65.2
  Bottom 0.305: v47,95 PB61.1
PB64  (via drill 0.6 pad 1)
  Top 0.305: v49,95 49.63,94.36 U11.6 49.63,90.64 49,90 46.5,90 46,90.5 46,91.85 R66.1
  Bottom 0.305: v49,95 PB65.1
PB65  (via drill 0.6 pad 1)
  Top 0.305: U11.5 50.91,94.91 v51,95 | U11.5 51,92.06 | LED11.2 53.55,87.45 50.91,90.09 U11.5
  Bottom 0.305: v51,95 PB60.1
PB66  (via drill 0.6 pad 1)
  Top 0.305: R67.1 66.7,85.85 U12.1 67.09,83.09 v67,83
  Bottom 0.305: v67,83 PB68.1
PB67  (via drill 0.6 pad 1)
  Top 0.305: v71,83 69.62,84.38 U12.3 69.62,87.58 68,89 65.85,89 R69.1
  Bottom 0.305: v71,83 71,84 PB70.1
PB68  (via drill 0.6 pad 1)
  Top 0.305: R68.1 65.85,88 67.6,88 68.36,87.25 U12.2 68.36,83.64 v69,83
  Bottom 0.305: v69,83 67,85 67,87 68,88 72,88 PB69.1
PB69  (via drill 0.6 pad 1)
  Top 0.305: U12.7 68.36,93.64 v67,95 68.5,96.5 71.5,96.5 72,96 R71.2
  Bottom 0.305: v67,95 PB67.1
PB70  (via drill 0.6 pad 1)
  Top 0.305: v69,95 69.64,94.36 U12.6 69.64,90.64 69,90 66.5,90 66,90.5 66,91.85 R72.1
  Bottom 0.305: v69,95 PB71.1
PB71  (via drill 0.6 pad 1)
  Top 0.305: U12.5 70.91,94.91 v71,95 | U12.5 71,92.06 | LED12.2 73.55,87.45 70.91,90.09 U12.5
  Bottom 0.305: v71,95 PB66.1
PIEZO_IN
  Top 0.305: R3.2 R2.2 R1.2 3.15,11.85 4.5,10.5 U$2.V+
PIEZO_IN1
  Top 0.305: R9.2 R8.2 R7.2 23.15,11.85 24.5,10.5 U$6.V+
PIEZO_IN2
  Top 0.305: R15.2 R14.2 R13.2 43.15,11.85 44.5,10.5 U$10.V+
PIEZO_IN3
  Top 0.305: R21.2 R20.2 R19.2 63.15,11.85 64.5,10.5 U$14.V+
PIEZO_IN4
  Top 0.305: R27.2 R26.2 R25.2 3.15,45.85 4.5,44.5 U$18.V+
PIEZO_IN5
  Top 0.305: R33.2 R32.2 R31.2 23.15,45.85 24.5,44.5 U$22.V+
PIEZO_IN6
  Top 0.305: R39.2 R38.2 R37.2 43.15,45.85 44.5,44.5 U$26.V+
PIEZO_IN7
  Top 0.305: R45.2 R44.2 R43.2 63.15,45.85 64.5,44.5 U$30.V+
PIEZO_IN8
  Top 0.305: R51.2 R50.2 R49.2 3.15,79.85 4.5,78.5 U$34.V+
PIEZO_IN9
  Top 0.305: R57.2 R56.2 R55.2 23.15,79.85 24.5,78.5 U$38.V+
PIEZO_IN10
  Top 0.305: R63.2 R62.2 R61.2 43.15,79.85 44.5,78.5 U$42.V+
PIEZO_IN11
  Top 0.305: R69.2 R68.2 R67.2 63.15,79.85 64.5,78.5 U$46.V+
RF_DATA_OUT
  Top 0.305: U$1.2 17,8 | 17,8 U$1.3 | R6.2 2,23.85 2,9 3,8 17,8
RF_DATA_OUT1
  Top 0.305: U$5.2 37,8 | 37,8 U$5.3 | R12.2 22,23.85 22,9 23,8 37,8
RF_DATA_OUT2
  Top 0.305: U$9.2 57,8 | 57,8 U$9.3 | R18.2 42,23.85 42,9 43,8 57,8
RF_DATA_OUT3
  Top 0.305: U$13.2 77,8 | 77,8 U$13.3 | R24.2 62,23.85 62,9 63,8 77,8
RF_DATA_OUT4
  Top 0.305: U$17.2 17,42 | 17,42 U$17.3 | R30.2 2,57.85 2,43 3,42 17,42
RF_DATA_OUT5
  Top 0.305: U$21.2 37,42 | 37,42 U$21.3 | R36.2 22,57.85 22,43 23,42 37,42
RF_DATA_OUT6
  Top 0.305: U$25.2 57,42 | 57,42 U$25.3 | R42.2 42,57.85 42,43 43,42 57,42
RF_DATA_OUT7
  Top 0.305: U$29.2 77,42 | 77,42 U$29.3 | R48.2 62,57.85 62,43 63,42 77,42
RF_DATA_OUT8
  Top 0.305: U$33.2 17,76 | 17,76 U$33.3 | R54.2 2,91.85 2,77 3,76 17,76
RF_DATA_OUT9
  Top 0.305: U$37.2 37,76 | 37,76 U$37.3 | R60.2 22,91.85 22,77 23,76 37,76
RF_DATA_OUT10
  Top 0.305: U$41.2 57,76 | 57,76 U$41.3 | R66.2 42,91.85 42,77 43,76 57,76
RF_DATA_OUT11
  Top 0.305: U$45.2 77,76 | 77,76 U$45.3 | R72.2 62,91.85 62,77 63,76 77,76
SENSOR_OUT
  Top 0.305: R4.1 13.15,22.65 14.85,24.35 C2.1 R5.1 14.85,30.61 U$4.VBAT
SENSOR_OUT1
  Top 0.305: R10.1 33.15,22.65 34.85,24.35 C4.1 R11.1 34.85,30.61 U$8.VBAT
SENSOR_OUT2
  Top 0.305: R16.1 53.15,22.65 54.85,24.35 C6.1 R17.1 54.85,30.61 U$12.VBAT
SENSOR_OUT3
  Top 0.305: R22.1 73.15,22.65 74.85,24.35 C8.1 R23.1 74.85,30.61 U$16.VBAT
SENSOR_OUT4
  Top 0.305: R28.1 13.15,56.65 14.85,58.35 C10.1 R29.1 14.85,64.61 U$20.VBAT
SENSOR_OUT5
  Top 0.305: R34.1 33.15,56.65 34.85,58.35 C12.1 R35.1 34.85,64.61 U$24.VBAT
SENSOR_OUT6
  Top 0.305: R40.1 53.15,56.65 54.85,58.35 C14.1 R41.1 54.85,64.61 U$28.VBAT
SENSOR_OUT7
  Top 0.305: R46.1 73.15,56.65 74.85,58.35 C16.1 R47.1 74.85,64.61 U$32.VBAT
SENSOR_OUT8
  Top 0.305: R52.1 13.15,90.65 14.85,92.35 C18.1 R53.1 14.85,98.61 U$36.VBAT
SENSOR_OUT9
  Top 0.305: R58.1 33.15,90.65 34.85,92.35 C20.1 R59.1 34.85,98.61 U$40.VBAT
SENSOR_OUT10
  Top 0.305: R64.1 53.15,90.65 54.85,92.35 C22.1 R65.1 54.85,98.61 U$44.VBAT
SENSOR_OUT11
  Top 0.305: R70.1 73.15,90.65 74.85,92.35 C24.1 R71.1 74.85,98.61 U$48.VBAT
VCC
  Top 0.305: C1.1 4.9,27.95 4.9,27 6.1,25.8 6.7,25.8 7.1,25.4 7.09,25.39 U1.8 | U$1.4 16.98,11.6 15.1,11.6 14.4,12.3 LED1.3 16,16.15 16,20.85 R4.2
  Top 0.406: C1.1 4.85,30.31 U$3.VBAT
  Bottom 0.305: 14.19,11.81 VCC.1 14.38,11.62 U$1.4
  Bottom 0.406: U$3.VBAT 7.54,29 13,29 17,25 U$1.4
VCC1
  Top 0.305: C3.1 24.9,27.95 24.9,27 26.1,25.8 26.7,25.8 27.1,25.4 27.09,25.39 U2.8 | U$5.4 36.98,11.6 35.1,11.6 34.4,12.3 LED2.3 36,16.15 36,20.85 R10.2
  Top 0.406: C3.1 24.85,30.31 U$7.VBAT
  Bottom 0.305: 34.19,11.81 VCC1.1 34.38,11.62 U$5.4
  Bottom 0.406: U$7.VBAT 27.54,29 33,29 37,25 U$5.4
VCC2
  Top 0.305: C5.1 44.9,27.95 44.9,27 46.1,25.8 46.7,25.8 47.1,25.4 47.09,25.39 U3.8 | U$9.4 56.98,11.6 55.1,11.6 54.4,12.3 LED3.3 56,16.15 56,20.85 R16.2
  Top 0.406: C5.1 44.85,30.31 U$11.VBAT
  Bottom 0.305: 54.19,11.81 VCC2.1 54.38,11.62 U$9.4
  Bottom 0.406: U$11.VBAT 47.54,29 53,29 57,25 U$9.4
VCC3
  Top 0.305: C7.1 64.9,27.95 64.9,27 66.1,25.8 66.7,25.8 67.1,25.4 67.09,25.39 U4.8 | U$13.4 76.98,11.6 75.1,11.6 74.4,12.3 LED4.3 76,16.15 76,20.85 R22.2
  Top 0.406: C7.1 64.85,30.31 U$15.VBAT
  Bottom 0.305: 74.19,11.81 VCC3.1 74.38,11.62 U$13.4
  Bottom 0.406: U$15.VBAT 67.54,29 73,29 77,25 U$13.4
VCC4
  Top 0.305: C9.1 4.9,61.95 4.9,61 6.1,59.8 6.7,59.8 7.1,59.4 7.09,59.4 U5.8 | U$17.4 16.98,45.6 15.1,45.6 14.4,46.3 LED5.3 16,50.15 16,54.85 R28.2
  Top 0.406: C9.1 4.85,64.31 U$19.VBAT
  Bottom 0.305: 14.19,45.81 VCC4.1 14.38,45.62 U$17.4
  Bottom 0.406: U$19.VBAT 7.54,63 13,63 17,59 U$17.4
VCC5
  Top 0.305: C11.1 24.9,61.95 24.9,61 26.1,59.8 26.7,59.8 27.1,59.4 27.09,59.4 U6.8 | U$21.4 36.98,45.6 35.1,45.6 34.4,46.3 LED6.3 36,50.15 36,54.85 R34.2
  Top 0.406: C11.1 24.85,64.31 U$23.VBAT
  Bottom 0.305: 34.19,45.81 VCC5.1 34.38,45.62 U$21.4
  Bottom 0.406: U$23.VBAT 27.54,63 33,63 37,59 U$21.4
VCC6
  Top 0.305: C13.1 44.9,61.95 44.9,61 46.1,59.8 46.7,59.8 47.1,59.4 47.09,59.4 U7.8 | U$25.4 56.98,45.6 55.1,45.6 54.4,46.3 LED7.3 56,50.15 56,54.85 R40.2
  Top 0.406: C13.1 44.85,64.31 U$27.VBAT
  Bottom 0.305: 54.19,45.81 VCC6.1 54.38,45.62 U$25.4
  Bottom 0.406: U$27.VBAT 47.54,63 53,63 57,59 U$25.4
VCC7
  Top 0.305: C15.1 64.9,61.95 64.9,61 66.1,59.8 66.7,59.8 67.1,59.4 67.09,59.4 U8.8 | U$29.4 76.98,45.6 75.1,45.6 74.4,46.3 LED8.3 76,50.15 76,54.85 R46.2
  Top 0.406: C15.1 64.85,64.31 U$31.VBAT
  Bottom 0.305: 74.19,45.81 VCC7.1 74.38,45.62 U$29.4
  Bottom 0.406: U$31.VBAT 67.54,63 73,63 77,59 U$29.4
VCC8
  Top 0.305: C17.1 4.9,95.95 4.9,95 6.1,93.8 6.7,93.8 7.1,93.4 7.09,93.39 U9.8 | U$33.4 16.98,79.6 15.1,79.6 14.4,80.3 LED9.3 16,84.15 16,88.85 R52.2
  Top 0.406: C17.1 4.85,98.31 U$35.VBAT
  Bottom 0.305: 14.19,79.81 VCC8.1 14.38,79.62 U$33.4
  Bottom 0.406: U$35.VBAT 7.54,97 13,97 17,93 U$33.4
VCC9
  Top 0.305: C19.1 24.9,95.95 24.9,95 26.1,93.8 26.7,93.8 27.1,93.4 27.09,93.39 U10.8 | U$37.4 36.98,79.6 35.1,79.6 34.4,80.3 LED10.3 36,84.15 36,88.85 R58.2
  Top 0.406: C19.1 24.85,98.31 U$39.VBAT
  Bottom 0.305: 34.19,79.81 VCC9.1 34.38,79.62 U$37.4
  Bottom 0.406: U$39.VBAT 27.54,97 33,97 37,93 U$37.4
VCC10
  Top 0.305: C21.1 44.9,95.95 44.9,95 46.1,93.8 46.7,93.8 47.1,93.4 47.09,93.39 U11.8 | U$41.4 56.98,79.6 55.1,79.6 54.4,80.3 LED11.3 56,84.15 56,88.85 R64.2
  Top 0.406: C21.1 44.85,98.31 U$43.VBAT
  Bottom 0.305: 54.19,79.81 VCC10.1 54.38,79.62 U$41.4
  Bottom 0.406: U$43.VBAT 47.54,97 53,97 57,93 U$41.4
VCC11
  Top 0.305: C23.1 64.9,95.95 64.9,95 66.1,93.8 66.7,93.8 67.1,93.4 67.09,93.39 U12.8 | U$45.4 76.98,79.6 75.1,79.6 74.4,80.3 LED12.3 76,84.15 76,88.85 R70.2
  Top 0.406: C23.1 64.85,98.31 U$47.VBAT
  Bottom 0.305: 74.19,79.81 VCC11.1 74.38,79.62 U$45.4
  Bottom 0.406: U$47.VBAT 67.54,97 73,97 77,93 U$45.4

## Text on the board
tPlace: VCC | VCC | VCC | VCC | DATA | DATA | DATA | DATA | GND | GND | GND | GND | VCC | VCC | VCC | VCC | DATA | DATA | DATA | DATA | GND | GND | GND | GND | VCC | VCC | VCC | VCC | DATA | DATA | DATA | DATA | GND | GND | GND | GND
bPlace: NextMind MonoBlink_1.0 | NextMind MonoBlink_1.0 | NextMind MonoBlink_1.0 | NextMind MonoBlink_1.0 | NextMind MonoBlink_1.0 | NextMind MonoBlink_1.0 | NextMind MonoBlink_1.0 | NextMind MonoBlink_1.0 | NextMind MonoBlink_1.0 | NextMind MonoBlink_1.0 | NextMind MonoBlink_1.0 | NextMind MonoBlink_1.0
_tNames: C1 | R5 | C1 | R5 | C1 | R5 | C1 | R5 | R6 | U1 | C2 | R6 | U1 | C2 | R6 | U1 | C2 | R6 | U1 | C2 | R3 | R4 | R3 | R4 | R3 | R4 | R3 | R4 | R2 | R2 | R2 | R2 | R1 | R1 | R1 | R1 | LED1 | LED1 | LED1 | LED1 | C1 | R5 | C1 | R5 | C1 | R5 | C1 | R5 | R6 | U1 | C2 | R6 | U1 | C2 | R6 | U1 | C2 | R6 | U1 | C2 | R3 | R4 | R3 | R4 | R3 | R4 | R3 | R4 | R2 | R2 | R2 | R2 | R1 | R1 | R1 | R1 | LED1 | LED1 | LED1 | LED1 | C1 | R5 | C1 | R5 | C1 | R5 | C1 | R5 | R6 | U1 | C2 | R6 | U1 | C2 | R6 | U1 | C2 | R6 | U1 | C2 | R3 | R4 | R3 | R4 | R3 | R4 | R3 | R4 | R2 | R2 | R2 | R2 | R1 | R1 | R1 | R1 | LED1 | LED1 | LED1 | LED1
_bNames: PB2 | PB1 | PB0 | PB2 | PB1 | PB0 | PB2 | PB1 | PB0 | PB2 | PB1 | PB0 | PB5 | PB4 | PB3 | PB5 | PB4 | PB3 | PB5 | PB4 | PB3 | PB5 | PB4 | PB3 | GND | VCC | GND | VCC | GND | VCC | GND | VCC | PB2 | PB1 | PB0 | PB2 | PB1 | PB0 | PB2 | PB1 | PB0 | PB2 | PB1 | PB0 | PB5 | PB4 | PB3 | PB5 | PB4 | PB3 | PB5 | PB4 | PB3 | PB5 | PB4 | PB3 | GND | VCC | GND | VCC | GND | VCC | GND | VCC | PB2 | PB1 | PB0 | PB2 | PB1 | PB0 | PB2 | PB1 | PB0 | PB2 | PB1 | PB0 | PB5 | PB4 | PB3 | PB5 | PB4 | PB3 | PB5 | PB4 | PB3 | PB5 | PB4 | PB3 | GND | VCC | GND | VCC | GND | VCC | GND | VCC